# Altium PCB Shelf_System_F.PcbDoc
Units mm, origin at the board's own origin, x right, y up, seen from the top; angles counter-clockwise.
Board outline 77.72 x 94.87 mm, 2 copper layers (Top Layer, Bottom Layer); 17 components, 22 nets, 102 pads, 14 vias.
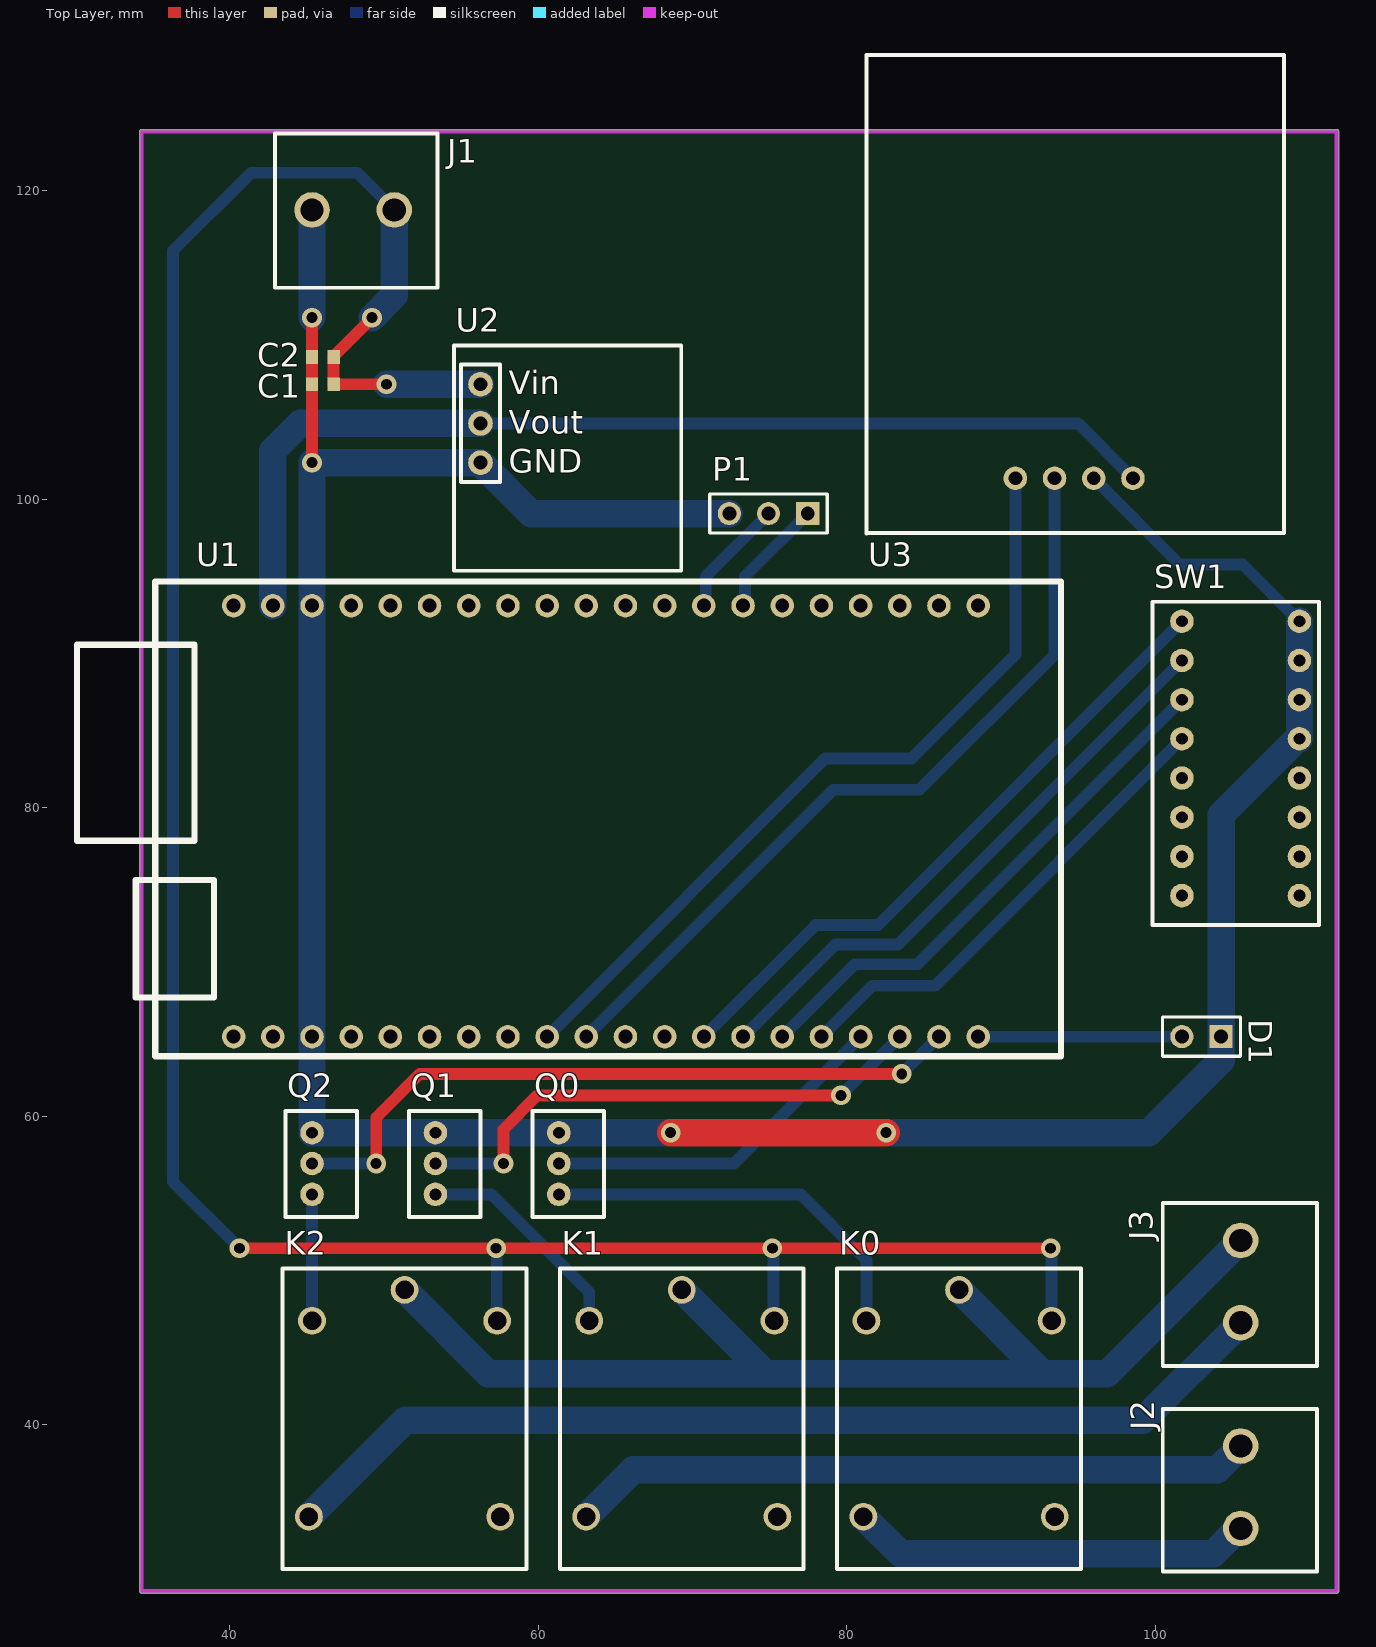
[diagram p0: Top Layer view]
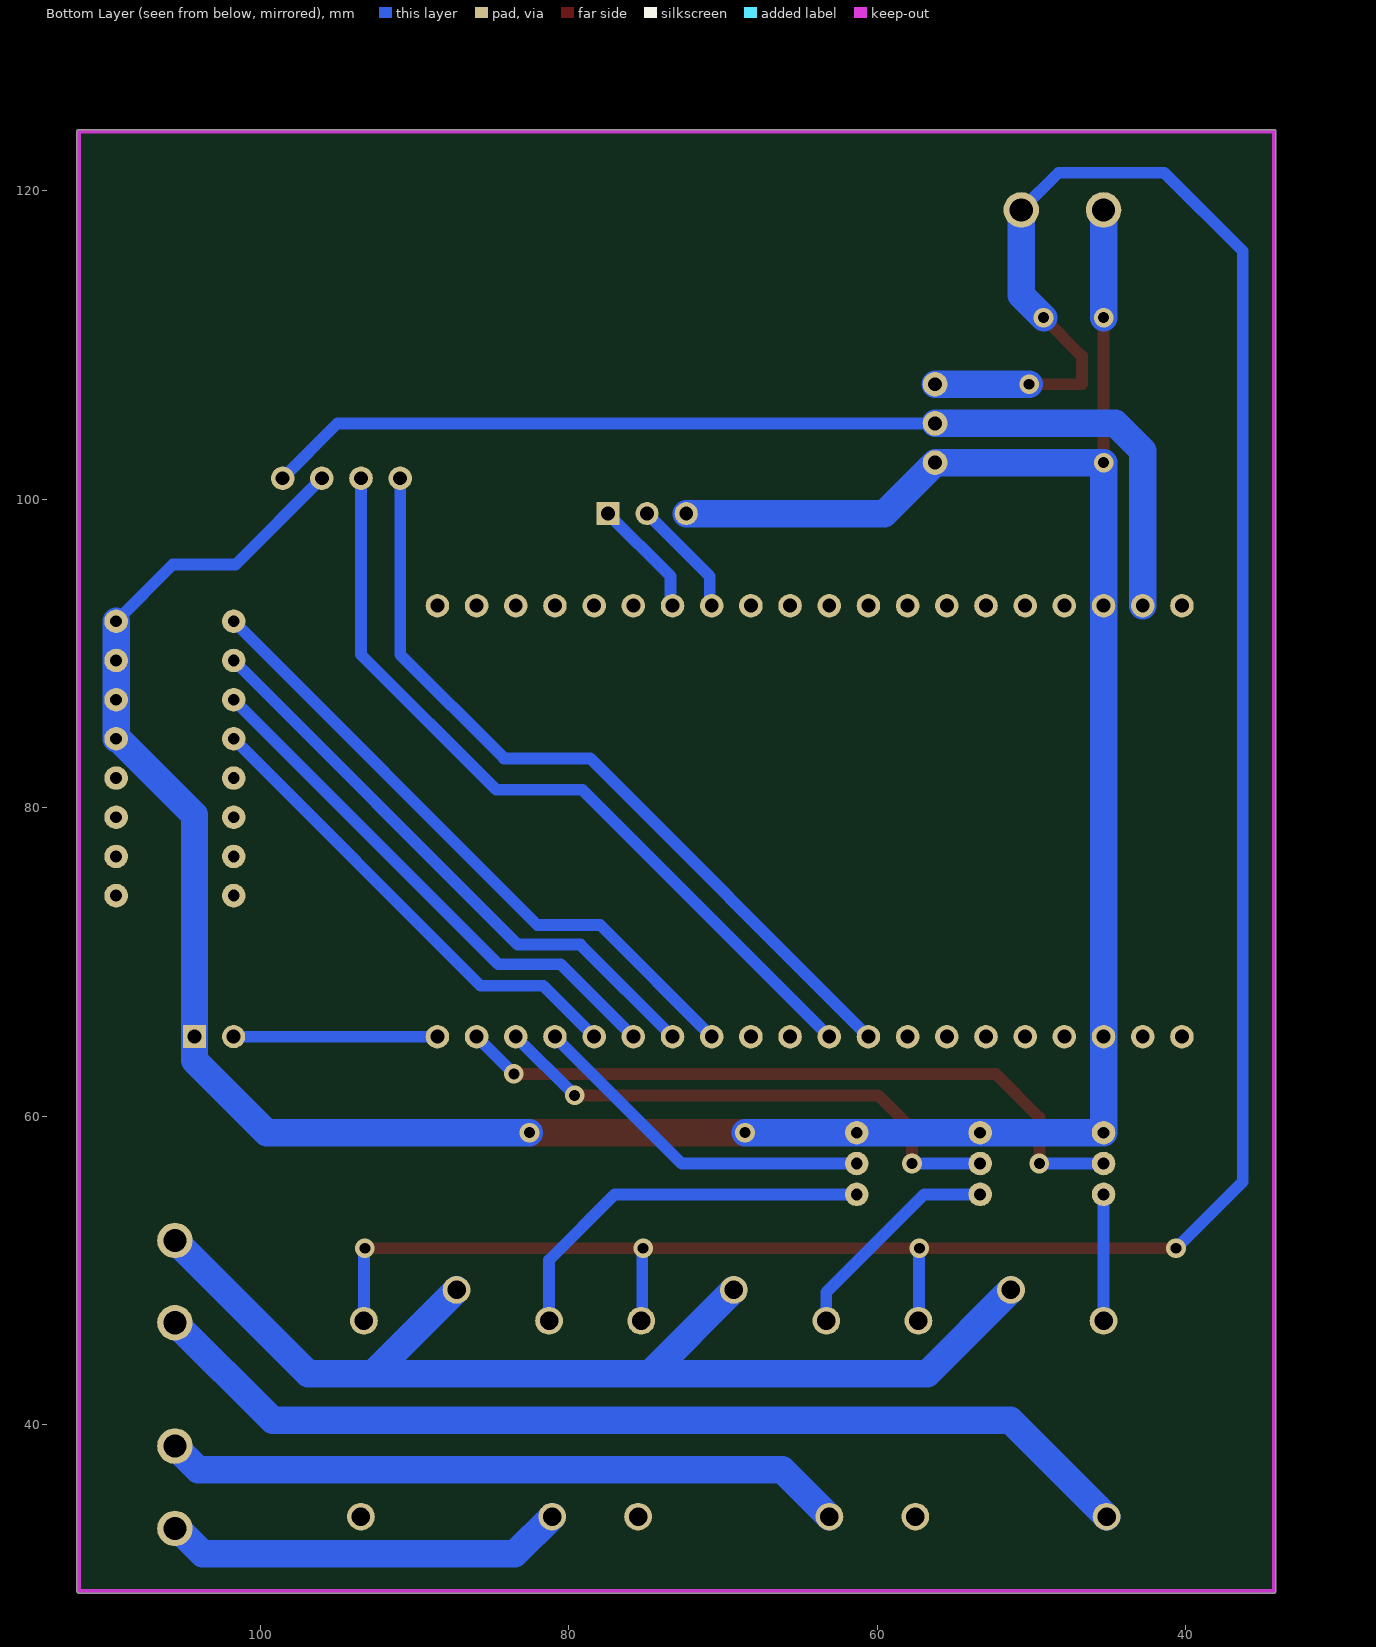
[diagram p1: Bottom Layer view, seen from below]

## Layer stack, top to bottom
Top Solder: solder mask 0.0102, Solder Resist, Dk 3.5
Top Layer: signal copper 0.0356
Dielectric 1: dielectric 0.32, FR-4, Dk 4.8
Bottom Layer: signal copper 0.0356
Bottom Solder: solder mask 0.0102, Solder Resist, Dk 3.5

## Board outline
34.163,29.21 ccw(c34.29,29.21) 34.29,29.083 111.76,29.083 ccw(c111.76,29.21) 111.887,29.21 111.887,123.825 ccw(c111.76,123.825) 111.76,123.952 34.29,123.952 ccw(c34.29,123.825) 34.163,123.825

## Design rules (kind name [scope] priority, off if disabled: settings)
Clearance [All] p1: gap=0.254 ignorepadtopadclearanceinfootprint=FALSE except(0: Arc-Hole Track-Hole SMDPad-Hole THPad-Hole Via-Hole Fill-Hole Poly-Hole Region-Hole Text-Hole)
PolygonConnect [All] p1: connectstyle=Relief reliefconductorwidth=0.254 reliefentries=4 polygonreliefangle="90 Angle" airgapwidth=0.254
RoutingVias [All] p1: holewidth=0.711 width=1.27 viastyle="Through Hole" minholewidth=0.711 minwidth=1.27 maxholewidth=0.711 maxwidth=1.27
SolderMaskExpansion [All] p1: expansion=0.102 istentingtop=FALSE
Width [All] p1: maxlimit=1.778 minlimit=0.254 preferedwidth=0.762 minimp=50.000000 maximp=50.000000 favimp=50.000000
30 further rules are at their usual default settings.

## Components (designator, comment, footprint, x,y, rotation, side; value= is the part's Value field where it differs from the comment)
C1 "Cap Semi" 1608[0603] 46.039,107.442 r0 top value=2.2uF
C2 "Cap Semi" 1608[0603] 46.039,109.22 r0 top value=10uF
D1 "STATE LED" HDR1X2 104.267,65.151 r180 top
J1 "MX128V" MX128V 50.673,118.745 r270 top
J2 "MX128V" MX128V 105.537,33.274 r180 top
J3 "MX128V" MX128V 105.537,46.609 r180 top
K0 "RELAY" RELAY 87.28,48.736 r270 top
K1 "RELAY" RELAY 69.31,48.736 r270 top
K2 "RELAY" RELAY 51.339,48.736 r270 top
P1 "REPORT" HDR1X3 77.47,99.06 r180 top
Q0 "BJT" bjt 61.341,58.928 r270 top
Q1 "BJT" bjt 53.34,58.928 r270 top
Q2 "BJT" bjt 45.339,58.928 r270 top
SW1 "DIPSW" DIPSW 101.727,92.075 r270 top
U1 "STM32F103" STM32F103 88.519,65.151 r90 top
U2 "RT9187" RT9187 56.261,107.442 r0 top
U3 "ESP12s" ESP12s 90.932,101.346 r0 top

## Footprints (in the part's own frame and the unit in brackets; to place one, negate y for a bottom-side part, rotate by r counter-clockwise, add the part's x,y. Pads: shape width x height; smd on the part's side, far side on the other; paste and mask are expansions set on the pad)
1608[0603] [mm] "Chip Capacitor, Body 1.6x0.8mm, IPC High Density"
  rect 0.8x0.9 smd: 1(-0.7,0) 2(0.7,0)
  body extent -0.87,-0.48 0.87,0.48, height 1.3
bjt [mil]
  round 60 hole 30: 0(0,0) 1(78.74,0) 2(157.48,0)
  silkscreen extent -55,-68 215,115
DIPSW [mil]
  round 60 hole 30: 0(0,0) 1(100,0) 2(200,0) 3(300,0) 4(400,0) 5(500,0) 6(600,0) 7(700,0) 8(0,300) 9(100,300) 10(200,300) 11(300,300) 12(400,300) 13(500,300) 14(600,300) 15(700,300)
  silkscreen extent -50,-75 775,350
ESP12s [mil]
  round 60 hole 35.43: 0(0,0) 1(100,0) 2(200,0) 3(300,0)
  silkscreen extent -380,-140 685,1080
HDR1X2 [mm] "Connector; Header; 2 Position"
  rect 1.5x1.5 hole 0.9: 1(0,0)
  round 1.5 hole 0.9: 2(2.54,0)
  silkscreen extent -1.27,-1.27 3.81,1.27
HDR1X3 [mm] "Connector; Header; 3 Position"
  rect 1.5x1.5 hole 0.9: 1(0,0)
  round 1.5 hole 0.9: 2(2.54,0) 3(5.08,0)
  silkscreen extent -1.27,-1.27 6.35,1.27
MX128V [mm]
  round 2.3 hole 1.5: 0(0,0) 1(0,-5.334)
  silkscreen extent -4.95,-7.75 5.05,2.79
RELAY [mm]
  round 1.8 hole 1.2: 0(2,6) 1(0,0) 2(2,-6) 3(14.7,6.2) 4(14.7,-6.2)
  silkscreen extent -1.4,-7.9 18.1,7.9
RT9187 [mm]
  round 1.6 hole 0.9: 1(0,0) 2(0,-2.54) 3(0,-5.08)
  silkscreen extent -1.72,-12.09 13.01,2.52
STM32F103 [mil]
  round 60 hole 35.43: 0(1100,1900) 1(1100,1800) 2(1100,1700) 3(1100,1600) 4(1100,1500) 5(1100,1400) 6(1100,1300) 7(1100,1200) 8(1100,1100) 9(1100,1000) 10(1100,900) 11(1100,800) 12(1100,700) 13(1100,600) 14(1100,500) 15(1100,400) 16(1100,300) 17(1100,200) 18(1100,100) 19(1100,0) 20(0,1900) 21(0,1800) 22(0,1700) 23(0,1600) 24(0,1500) 25(0,1400) 26(0,1300) 27(0,1200) 28(0,1100) 29(0,1000) 30(0,900) 31(0,800) 32(0,700) 33(0,600) 34(0,500) 35(0,400) 36(0,300) 37(0,200) 38(0,100) 39(0,0)
  silkscreen extent -50,-211 1161,2300

## Part data
C1 C2: "Capacitor (Semiconductor SIM Model)", LatestRevisionDate=29-May-2009, LatestRevisionNote="IPC-7351 Footprint Added.", PackageDescription="Chip Capacitor", PackageReference=C1206, Published=8-Jun-2000, Publisher="Altium Limited"
D1: library part "Header 2", "Header, 2-Pin", LatestRevisionDate=17-Jul-2002, LatestRevisionNote="Re-released for DXP Platform.", Publisher="Altium Limited"
P1: library part "Header 3", "Header, 3-Pin", LatestRevisionDate=17-Jul-2002, LatestRevisionNote="Re-released for DXP Platform.", Publisher="Altium Limited"

## Via types
v1: diameter 1.27, hole 0.711, Top Layer to Bottom Layer, 14 vias

## Nets (pads, with @x,y where several pads share a name; then routed paths per layer and width w, separated by ;. In a path a pad name is that pad's centre, name@x,y a point inside that pad or via, vN(x,y) a via of type N, cw(c..) or ccw(c..) an arc to the next point about the centre after c; other vN are vias at no path point)
3.3V: U1.1 U2.2 U3.3 | length 68
  Bottom Layer w0.762: U2.2 94.996,104.902 U3.3
  Bottom Layer w1.778: U1.1 42.799,103.124 44.577,104.902 U2.2
5V: C1.2 C2.2 J1.0 K0.0 K1.0 K2.0 U2.1 | length 173.1
  Top Layer w0.762: v1(40.64,51.435) v1(57.277,51.435) v1(75.184,51.435) v1(93.218,51.435) ; v1(49.229,111.76) 46.739,109.27 C2.2 C1.2 v1(50.165,107.442)
  Bottom Layer w0.762: v1(40.64,51.435) 36.322,55.753 36.322,116.078 41.402,121.158 48.26,121.158 J1.0 ; v1(57.277,51.435) 57.308,51.404 57.308,46.767 K2.0 ; v1(75.184,51.435) 75.247,51.372 75.247,46.799 K1.0 ; v1(93.218,51.435) 93.28,51.373 K0.0
  Bottom Layer w1.778: v1(49.229,111.76) 50.673,113.204 J1.0 ; v1(50.165,107.442) U2.1
24V: J3.1 K0.1 K1.1 K2.1 | length 75.4
  Bottom Layer w1.778: K2.1 56.768,43.307 74.739,43.307 ; K1.1 74.739,43.307 ; K0.1 92.709,43.307 ; J3.1 96.901,43.307 92.709,43.307 ; 74.739,43.307 92.709,43.307
C0: K0.2 Q0.2 | length 25.6
  Bottom Layer w0.762: Q0.2 77.025,54.928 81.28,50.673 K0.2
C1: K1.2 Q1.2 | length 14.4
  Bottom Layer w0.762: Q1.2 56.959,54.928 63.309,48.578 K1.2
C2: K2.2 Q2.2 | length 8.2
  Bottom Layer w0.762: K2.2 Q2.2
Contral0: Q0.1 U1.36 | length 23
  Bottom Layer w0.762: Q0.1 72.676,56.928 U1.36
Contral1: Q1.1 U1.37 | length 34.8
  Top Layer w0.762: v1(57.753,56.928) 57.753,59.15 59.944,61.341 v1(79.629,61.341)
  Bottom Layer w0.762: Q1.1 v1(57.753,56.928) ; v1(79.629,61.341) U1.37
Contral2: Q2.1 U1.38 | length 45.8
  Top Layer w0.762: v1(49.498,56.928) 49.498,59.912 52.324,62.738 v1(83.566,62.738)
  Bottom Layer w0.762: Q2.1 v1(49.498,56.928) ; v1(83.566,62.738) U1.38
DIP1: SW1.0 U1.32 | length 42.1
  Bottom Layer w0.762: U1.32 77.978,72.39 82.042,72.39 SW1.0
DIP2: SW1.1 U1.33 | length 38.5
  Bottom Layer w0.762: U1.33 79.248,71.12 83.312,71.12 SW1.1
DIP3: SW1.2 U1.34 | length 35
  Bottom Layer w0.762: U1.34 80.518,69.85 84.582,69.85 SW1.2
DIP4: SW1.3 U1.35 | length 31.4
  Bottom Layer w0.762: U1.35 81.661,68.453 85.725,68.453 SW1.3
GND: C1.1 C2.1 D1.1 J1.1 P1.3 Q0.0 Q1.0 Q2.0 SW1.8 SW1.9 SW1.10 SW1.11 U1.2 U1.22 U2.3 U3.2 | length 196.9
  Top Layer w0.762: v1(45.339,102.362) C1.1 C2.1 v1(45.339,111.76)
  Top Layer w1.778: v1(68.58,58.928) v1(82.55,58.928)
  Bottom Layer w0.762: U3.2 101.6,95.758 105.664,95.758 SW1.8
  Bottom Layer w1.778: v1(45.339,111.76) J1.1 ; v1(68.58,58.928) Q0.0 Q1.0 Q2.0 U1.22 U1.2 v1(45.339,102.362) U2.3 59.563,99.06 P1.3 ; v1(82.55,58.928) 99.568,58.928 104.267,63.627 104.267,79.529 109.193,84.455 SW1.11 SW1.10 SW1.9 SW1.8
Output0: J2.0 K0.4 | length 26.1
  Bottom Layer w1.778: K0.4 83.493,31.623 103.745,31.623 105.396,33.274 J2.0
Output1: J2.1 K1.4 | length 44.3
  Bottom Layer w1.778: K1.4 66.158,37.084 104.013,37.084 J2.1
Output2: J3.0 K2.4 | length 65.6
  Bottom Layer w1.778: K2.4 51.378,40.275 99.203,40.275 J3.0
state_LED: D1.2 U1.39 | length 13.2
  Bottom Layer w0.762: U1.39 D1.2
UART1_Rx: U1.29 U3.1 | length 52
  Bottom Layer w0.762: U1.29 79.121,81.153 84.709,81.153 93.472,89.916 U3.1
UART1_Tx: U1.28 U3.0 | length 52
  Bottom Layer w0.762: U1.28 78.613,83.185 84.201,83.185 90.932,89.916 U3.0
UART2_Rx: P1.2 U1.12 | length 7.7
  Bottom Layer w0.762: U1.12 70.866,93.218 70.866,94.996 P1.2
UART2_Tx: P1.1 U1.13 | length 7.7
  Bottom Layer w0.762: U1.13 73.406,93.218 73.406,94.996 P1.1
pads on no net: K0.3 K1.3 K2.3 SW1.4 SW1.5 SW1.6 SW1.7 SW1.12 SW1.13 SW1.14 SW1.15 U1.0 U1.3 U1.4 U1.5 U1.6 U1.7 U1.8 U1.9 U1.10 U1.11 U1.14 U1.15 U1.16 U1.17 U1.18 U1.19 U1.20 U1.21 U1.23 U1.24 U1.25 U1.26 U1.27 U1.30 U1.31

## Keep-outs
Keep-Out Layer:
  lines w0.254: 34.29,29.21 111.76,29.21 111.76,123.825 34.29,123.825 34.29,29.21

## Text inside footprints (layer, text, board x,y; h text height)
U2: Top Overlay "GND" at 58.097,101.705 h1.52; Top Overlay "Vout" at 58.097,104.245 h1.52; Top Overlay "Vin" at 58.097,106.785 h1.52